# Altium PCB 电机控制.PcbDoc (part 1 of 4)
Units mil, origin at the board's own origin, x right, y up, seen from the top; angles counter-clockwise.
Board outline 4818.9 x 3440.94 mil, 2 copper layers (Top Layer, Bottom Layer); 168 components, 177 nets, 592 pads, 87 vias.
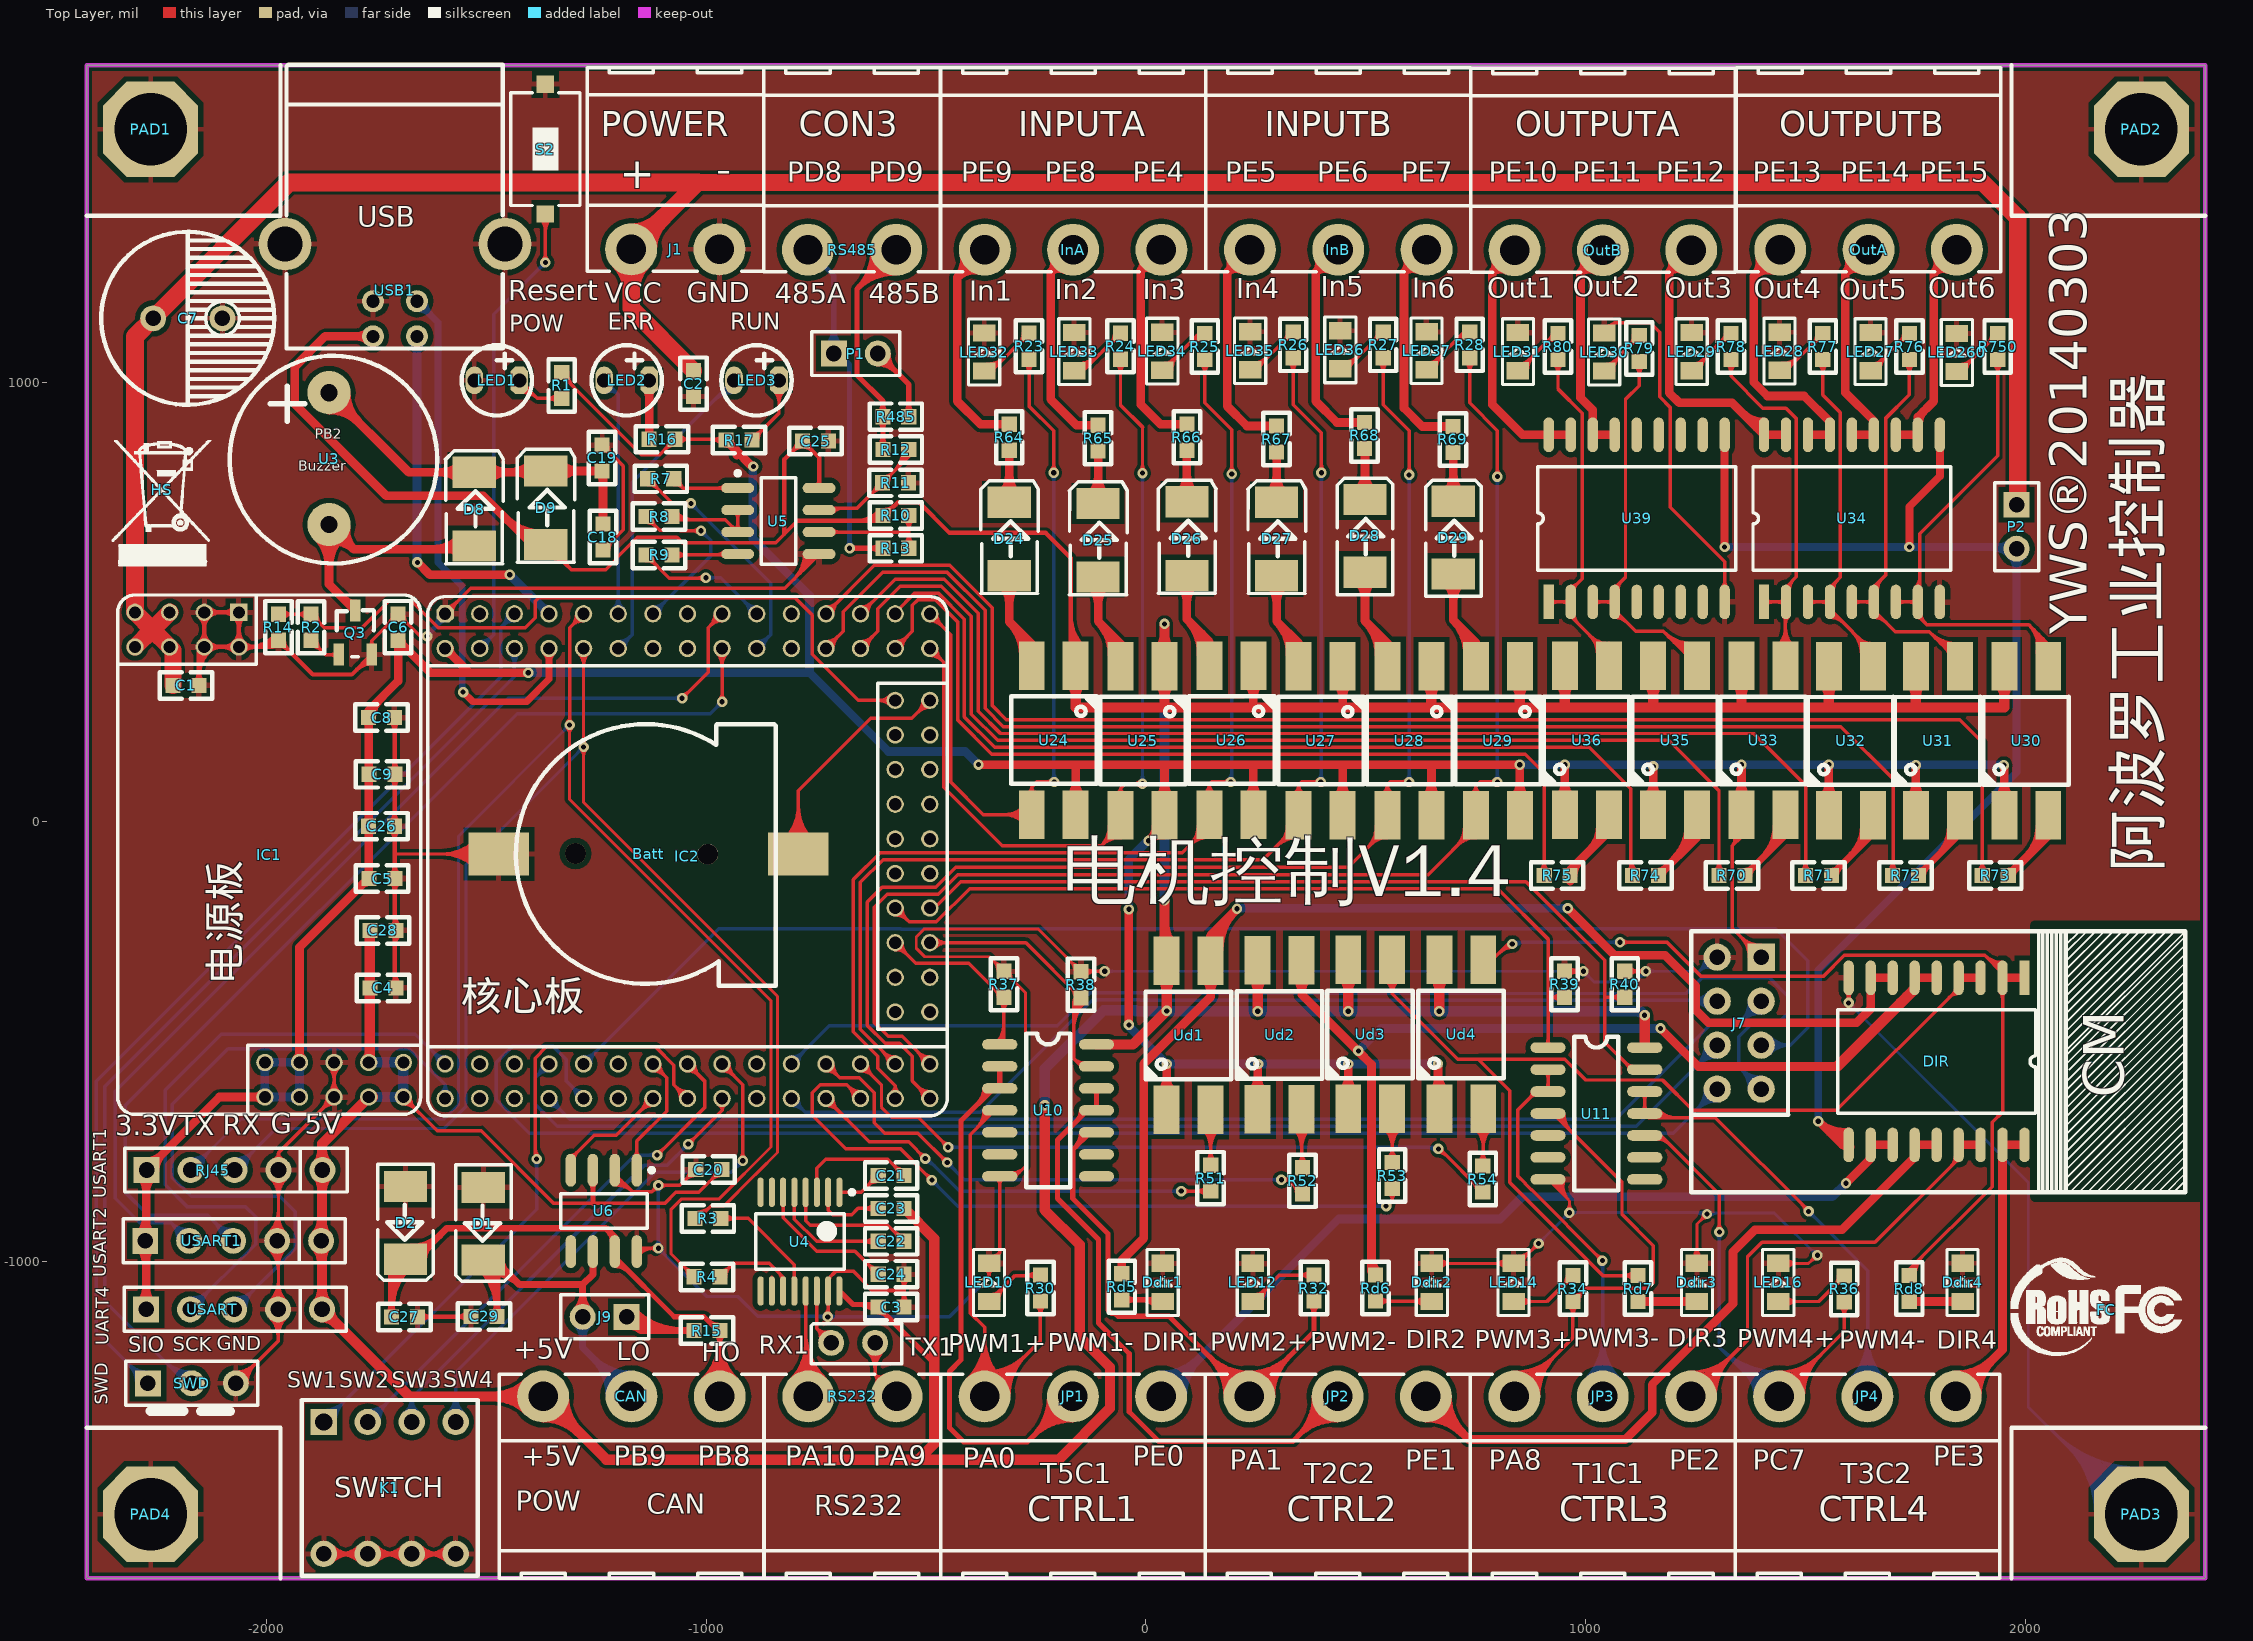
[diagram p0: Top Layer view]
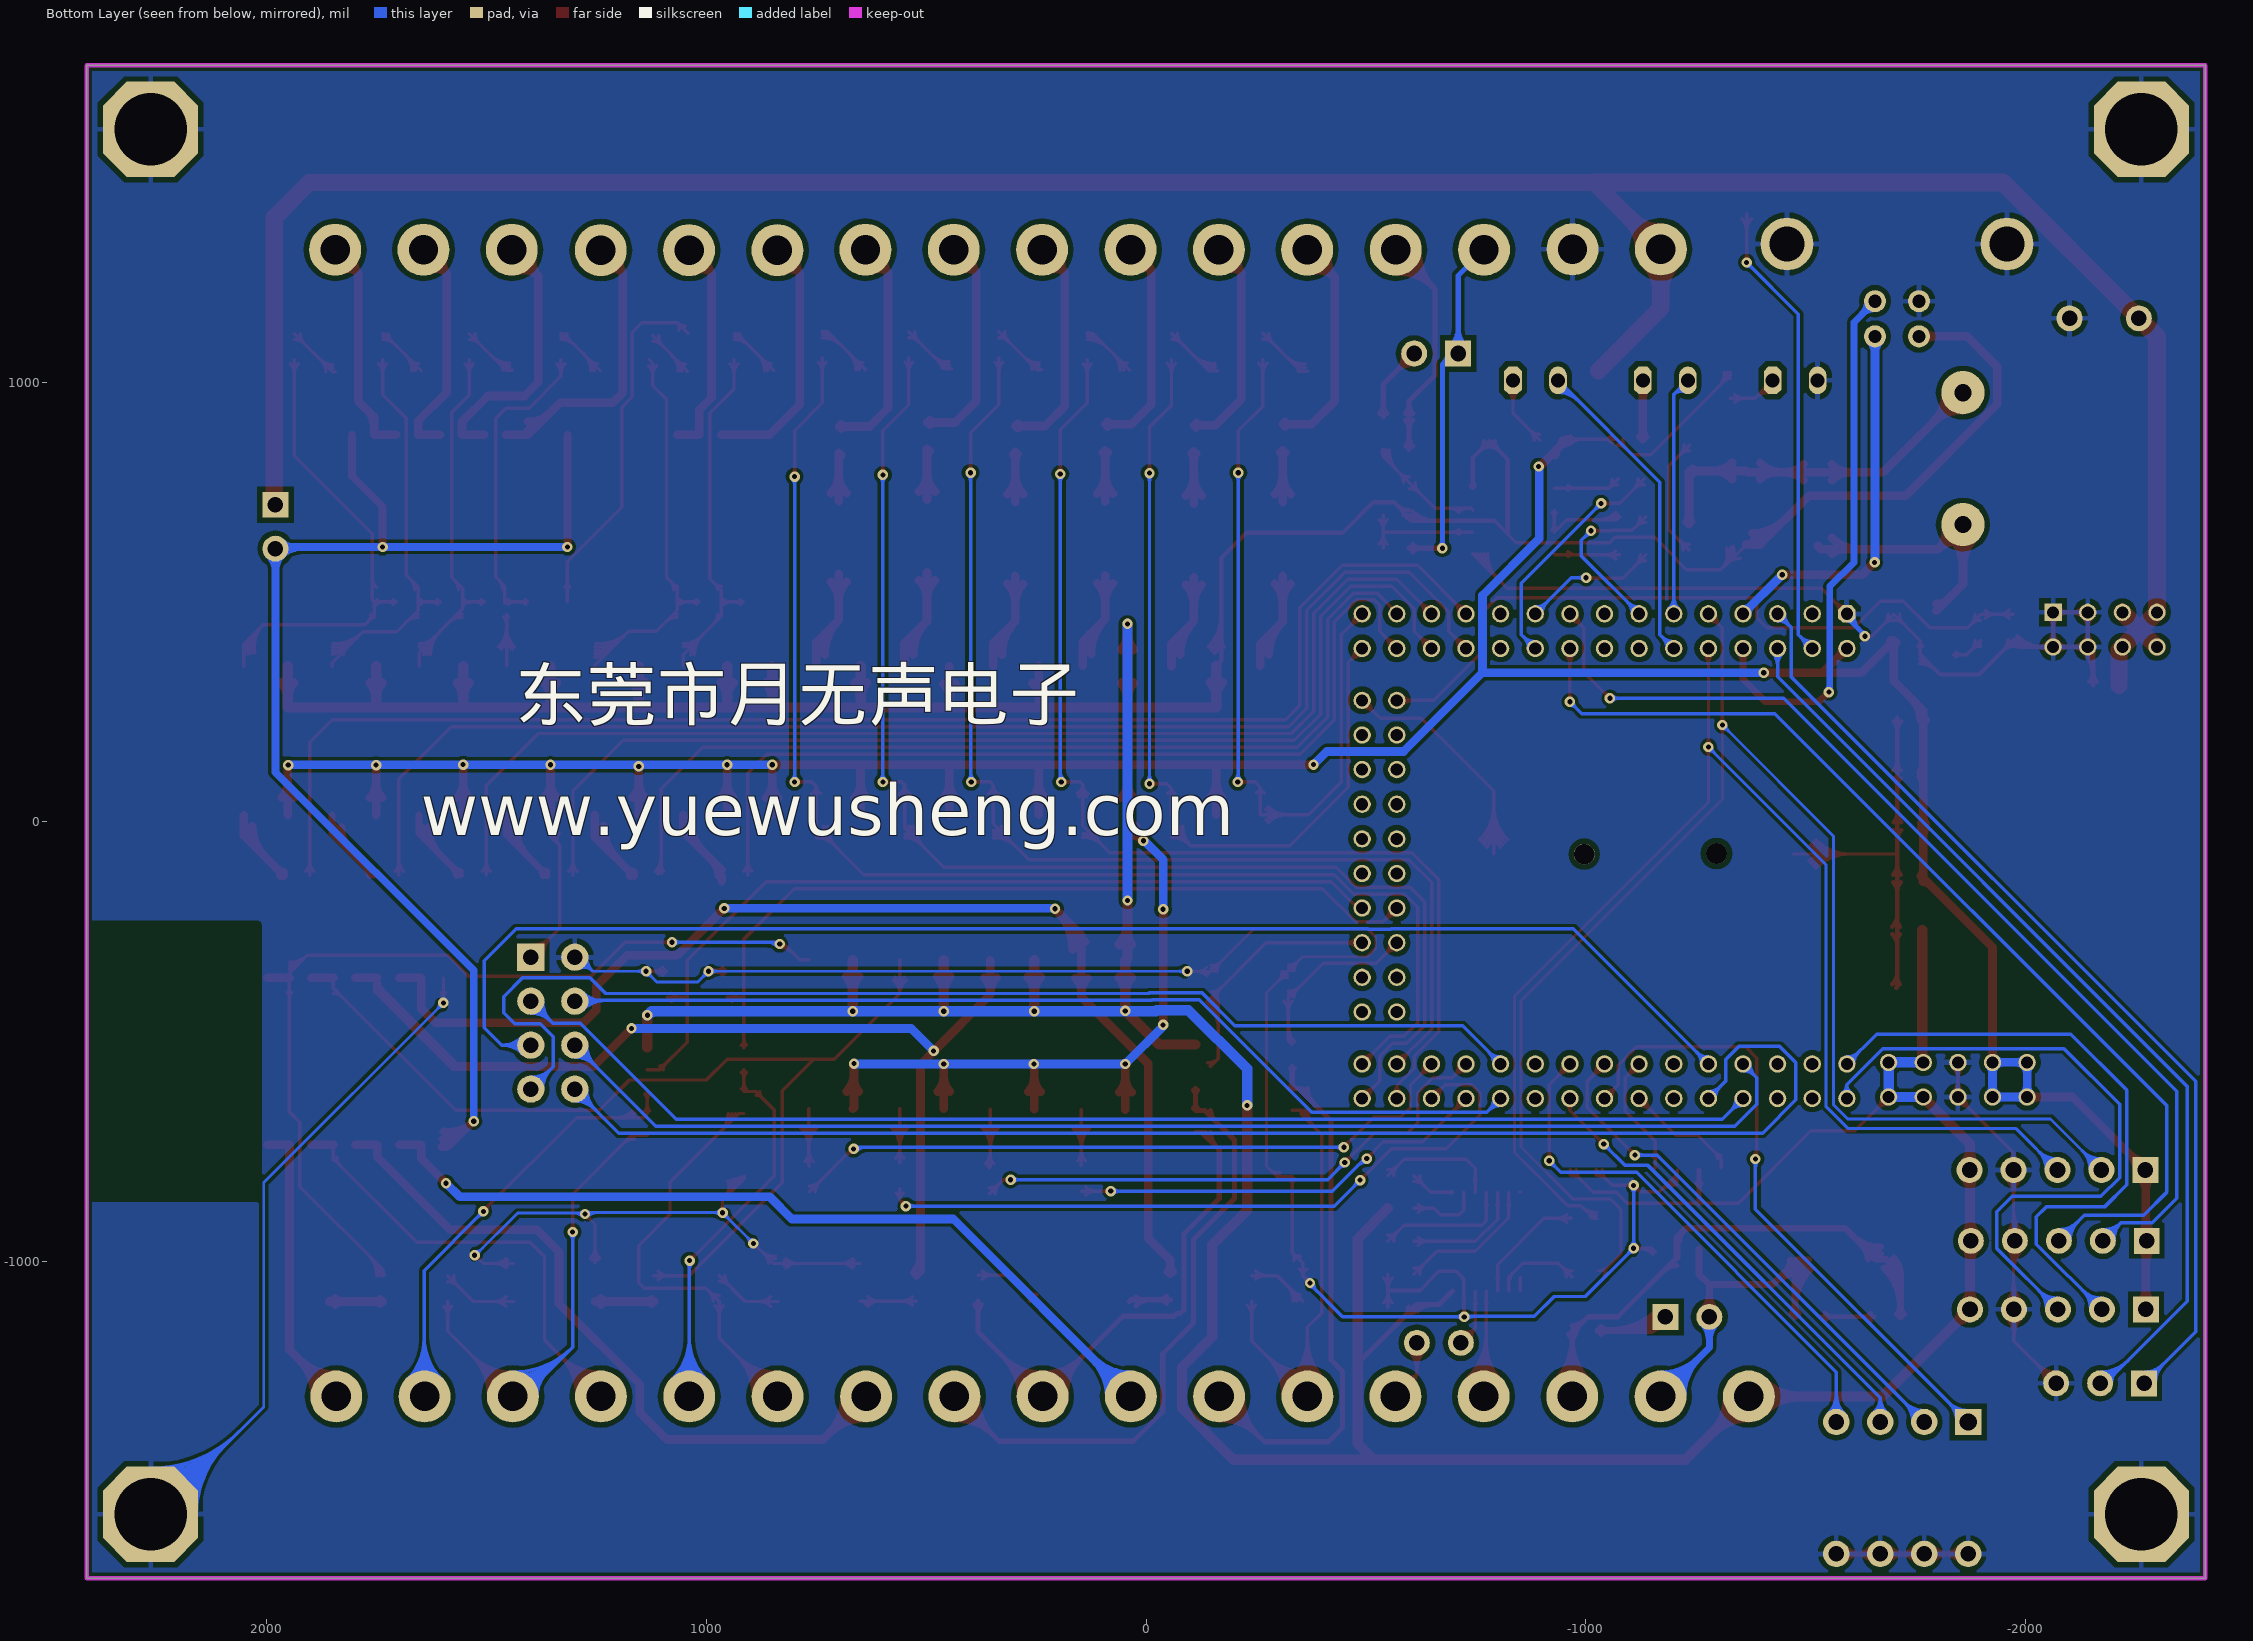
[diagram p1: Bottom Layer view, seen from below]

## Layer stack, top to bottom
Top Layer: signal copper 1.4
Dielectric: dielectric 12.6, FR-4, Dk 4.8
Bottom Layer: signal copper 1.4

## Board outline
-2409.45,-1720.47 2409.45,-1720.47 2409.45,1720.47 -2409.45,1720.47

## Design rules (kind name [scope] priority, off if disabled: settings)
Clearance [(InPadClass('All Pads')) vs InPolygon] p1: gap=11.81
Clearance Clearance_1 [All] p2: gap=7.87
ComponentClearance [All] p1 off: gap=10 collisioncheckmode=3 verticalgap=10 showdistances=FALSE
PlaneConnect [All] p1: planeconnectstyle=Relief reliefexpansion=0 reliefentries=4 reliefconductorwidth=11.81 reliefairgap=20
PolygonConnect PolygonConnect_1 [All vs IsComponentPad] p1: connectstyle=Relief reliefconductorwidth=11.81 reliefentries=4 polygonreliefangle="90 Angle" airgapwidth=11.81
PolygonConnect [All] p2: connectstyle=Direct reliefconductorwidth=11.81 reliefentries=4 polygonreliefangle="90 Angle" airgapwidth=11.81
RoomDefinition 公共电路 [InComponentClass('公共电路')] p1: confinementstyle=ConfineIn formatcopy=TRUE lockcomponents=FALSE outline -2462,-1764.69 2456,-1764.69 2456,1757 -2462,1757
RoomDefinition 电机控制 [InComponentClass('电机控制')] p2: confinementstyle=ConfineIn formatcopy=TRUE lockcomponents=FALSE outline 2480.32,1803.15 -472.44,1803.15 -472.44,-1791.34 2480.32,-1791.34
RoutingVias [All] p1: holewidth=11.81 width=23.62 viastyle="Through Hole" minholewidth=11.81 minwidth=23.62 maxholewidth=11.81 maxwidth=23.62
SolderMaskExpansion [All] p1: expansion=4
Width [All] p1: maxlimit=78.74 minlimit=6.3 preferedwidth=7.87 minimp=50.000000 maximp=50.000000 favimp=50.000000
26 further rules are at their usual default settings.

## Classes and differential pairs
component class 公共电路: Batt C1 C2 C3 C4 C5 C6 C7 C8 C9 C18 C19 C20 C21 C22 C23 C24 C25 C26 C27 C28 C29 CAN D1 D2 D8 D9 FC HS IC1 IC2 J1 J7 J9 K1 LED1 LED2 LED3 P1 PAD1 PAD2 PAD3 PAD4 Q3 R1 R2 R3 R4 R7 R8 R9 R10 R11 R12 R13 R14 R15 R16 R17 R485 RJ45 RS232 RS485 S2 U3 U4 U5 U6 USART usb1
component class 电机控制: D24 D25 D26 D27 D28 D29 Ddir1 Ddir2 Ddir3 Ddir4 DIR InA InB JP1 JP2 JP3 JP4 LED10 LED12 LED14 LED16 LED27 LED28 LED29 LED30 LED31 LED32 LED33 LED34 LED35 LED36 LED37 LED260 OutA OutB P2 R23 R24 R25 R26 R27 R28 R30 R32 R34 R36 R37 R38 R39 R40 R51 R52 R53 R54 R64 R65 R66 R67 R68 R69 R70 R71 R72 R73 R74 R75 R76 R77 R78 R79 R80 R750 Rd5 Rd6 Rd7 Rd8 U10 U11 U24 U25 U26 U27 U28 U29 U30 U31 U32 U33 U34 U35 U36 U39 Ud1 Ud2 Ud3 Ud4

## Components (designator, comment, footprint, x,y, rotation, side; value= is the part's Value field where it differs from the comment)
Batt "" MINI-BAT -791,-73 r180 top (schematic designator BATT1)
C1 "104" 0603A -2213,310 r0 top
C2 "104" 0603A -1029,1026 r270 top
C3 "104" 0603A -609.17,-1103.8 r0 top
C4 "104" 0603A -1765,-378 r0 top
C5 "104" 0603A -1767,-129 r0 top
C6 "104" 0603A -1701,413 r90 top
C7 "680UF/50V" 电解电容10mm -2258,1145 r270 top
C8 "104" 0603A -1768,237 r0 top
C9 "104" 0603A -1767,108 r0 top
C18 "104" 0603A -1235,677 r270 top
C19 "104" 0603A -1237,798 r90 top
C20 "104" 0603A -965,-791 r180 top
C21 "104" 0603A -609.17,-804.58 r0 top
C22 "104" 0603A -609.17,-954.19 r0 top
C23 "104" 0603A -609.17,-879.39 r0 top
C24 "104" 0603A -609.17,-1028.99 r0 top
C25 "104" 0603A -722,866 r180 top
C26 "104" 0603A -1709,-10 r180 top
C27 "104" 0603A -1716,-1126 r0 top
C28 "104" 0603A -1706,-247 r180 top
C29 "102" 0603A -1535,-1125 r0 top
CAN "CON3" CON3-5.1卧 -1371,-1307 r180 top
D1 "P6KE68A" 贴片二极管#1 -1507,-997 r270 top
D2 "P6KE6A" 贴片二极管#1 -1684,-995 r270 top
D8 "RB521S" 贴片二极管#2 -1525,846 r90 top
D9 "RB521S" 贴片二极管#2 -1362,849 r90 top
D24 "4148" 贴片二极管#2 -308,778 r90 top
D25 "4148" 贴片二极管#2 -106,775 r90 top
D26 "4148" 贴片二极管#2 96,779 r90 top
D27 "4148" 贴片二极管#2 300,778 r90 top
D28 "4148" 贴片二极管#1 498,733 r90 top
D29 "4148" 贴片二极管#1 699,729 r90 top
Ddir1 "LED" SMDLED 38,-1091 r90 top
Ddir2 "LED" SMDLED 650,-1091 r90 top
Ddir3 "LED" SMDLED 1253,-1091 r90 top
Ddir4 "LED" SMDLED 1857,-1091 r90 top
DIR "ULN2803" sol18 1998,-355 r270 top
FC "" fc 2184,-1110 r0 top
HS "" HS -2239,755 r0 top
IC1 "电源板" 电源板 -1689,-626 r270 top
IC2 "Core Board" 核心板-物联网1 -1594,473 r180 top
InA "CON3" CON3-5.1卧 35,1301 r0 top
InB "CON3" CON3-5.1卧 638,1301 r0 top
J1 "CON2" CON2-5.1卧 -970,1302 r0 top
J7 "NRF2401模块" NRF24L01 1299,-308 r180 top
J9 "" HDR1X2 -1181.1,-1125.99 r180 top
JP1 "CON3" CON3-5.1卧 -367,-1307 r180 top
JP2 "CON3" CON3-5.1卧 235,-1307 r180 top
JP3 "CON3" CON3-5.1卧 838,-1307 r180 top
JP4 "CON3" CON3-5.1卧 1440,-1307 r180 top
K1 "拨码开关*4" "PCBComponent_1 - duplicate" -1720,-1515 r0 top
LED1 "PLED" LED2.5 -1476.38,1003.94 r0 top
LED2 "RUN" LED2.5 -1181.1,1003.94 r0 top
LED3 "ERR" LED2.5 -885.83,1003.94 r0 top
LED10 "LED" SMDLED -357,-1091 r90 top (schematic designator LED18)
LED12 "LED" SMDLED 243,-1091 r90 top
LED14 "LED" SMDLED 836,-1091 r90 top
LED16 "LED" SMDLED 1438,-1091 r90 top
LED27 "LED" SMDLED 1648,1026 r90 top
LED28 "LED" SMDLED 1441,1027 r90 top
LED29 "LED" SMDLED 1241,1026 r90 top
LED30 "LED" SMDLED 1042,1025 r90 top
LED31 "LED" SMDLED 846,1026 r90 top
LED32 "LED" SMDLED -368,1025 r90 top
LED33 "LED" SMDLED -163,1026 r90 top
LED34 "LED" SMDLED 37,1027 r90 top
LED35 "LED" SMDLED 237,1028 r90 top
LED36 "LED" SMDLED 442,1030 r90 top
LED37 "LED" SMDLED 638,1028 r90 top
LED260 "LED" SMDLED 1844,1024 r90 top
OutA "CON3" CON3-5.1卧 1844,1301 r0 top
OutB "CON3" CON3-5.1卧 1240,1300 r0 top
P1 "" HDR1X2 -710,1065 r0 top
P2 "" HDR1X2 1980,721 r270 top
PAD1 "PAD" PAD -2263.78,1574.8 r0 top
PAD2 "PAD" PAD 2263.78,1574.8 r0 top
PAD3 "PAD" PAD 2263.78,-1574.8 r0 top
PAD4 "PAD" PAD -2263.78,-1574.8 r0 top
Q3 "9013" SOT23 -1836,380 r0 top
R1 "160R" 0603A -1329,1022 r270 top
R2 "1K" 0603A -1899,472 r270 top
R3 "33R" 0603A -1026,-902 r0 top
R4 "33R" 0603A -1028,-1035 r0 top
R7 "33R" 0603A -1133,780 r0 top
R8 "33R" 0603A -1137,694 r0 top
R9 "33R" 0603A -1137,607 r0 top
R10 "100K" 0603A -539.37,696.85 r180 top
R11 "100K" 0603A -599,771 r0 top
R12 "33R" 0603A -539.37,846.46 r180 top
R13 "33R" 0603A -539.37,622.05 r180 top
R14 "10K" 0603A -1973,413 r90 top
R15 "120R" 0603A -969,-1157 r180 top
R16 "160R" 0603A -1071,870 r180 top (schematic designator R38)
R17 "160R" 0603A -955,868 r0 top (schematic designator R39)
R23 "270R" 0603A -266,1052 r90 top
R24 "270R" 0603A -58,1052 r90 top
R25 "270R" 0603A 133.86,1051.18 r90 top
R26 "270R" 0603A 334.65,1055.12 r90 top
R27 "270R" 0603A 539.37,1055.12 r90 top
R28 "270R" 0603A 736.22,1055.12 r90 top
R30 "270R" 0603A -240,-1090 r90 top
R32 "270R" 0603A 382,-1090 r90 top
R34 "270R" 0603A 971,-1091 r90 top
R36 "270R" 0603A 1588,-1092 r90 top
R37 "270R" 0603A -323,-399 r90 top
R38 "270R" 0603A -148,-400 r90 top
R39 "270R" 0603A 952,-399 r90 top
R40 "270R" 0603A 1089,-399 r90 top
R51 "51R" 0603A 147,-840 r90 top (schematic designator Rd1)
R52 "51R" 0603A 356,-846 r90 top (schematic designator Rd2)
R53 "51R" 0603A 560,-834 r90 top (schematic designator Rd3)
R54 "51R" 0603A 766,-842 r90 top (schematic designator Rd4)
R64 "270R" 0603A -311,845 r90 top
R65 "270R" 0603A -109,843 r90 top
R66 "270R" 0603A 93,845 r90 top
R67 "270R" 0603A 297,841 r90 top
R68 "270R" 0603A 497,849 r90 top
R69 "270R" 0603A 698,840 r90 top
R70 "51R" 0603A 1303.15,-122.05 r0 top
R71 "51R" 0603A 1500,-122.05 r0 top
R72 "51R" 0603A 1698,-122.05 r0 top
R73 "51R" 0603A 1902,-122 r0 top
R74 "R" 0603A 1106.3,-122.05 r0 top
R75 "51R" 0603A 905.51,-122.05 r0 top
R76 "270R" 0603A 1736.22,1051.18 r90 top
R77 "270R" 0603A 1539.37,1051.18 r90 top
R78 "270R" 0603A 1330.71,1051.18 r90 top
R79 "270R" 0603A 1122,1047 r90 top
R80 "270R" 0603A 937.01,1051.18 r90 top
R485 "120R" 0603A -539.37,921.26 r180 top
R750 "270R" 0603A 1937.01,1051.18 r90 top
Rd5 "270R" 0603A -55,-1028 r270 top
Rd6 "270R" 0603A 522,-1031 r270 top
Rd7 "270R" 0603A 1119,-1032 r270 top
Rd8 "270R" 0603A 1736,-1032 r270 top
RJ45 "COM2" HDR1X4 -2273,-792 r0 top
RS232 "COM1" CON2-5.1卧 -768,-1307 r180 top
RS485 "COM3" CON2-5.1卧 -568,1301 r0 top (schematic designator J4)
S2 "RESRT" SW-PB2 -1366,1530 r90 top
SWD "Debug" HDR1X3 -2270,-1277 r0 top
U3 "蜂鸣器" 蜂鸣器 -1858,826 r90 top
U4 "SP3232" TSSOP16 -786.93,-954.94 r270 top
U5 "SP485" SO8_L -836,684 r0 top
U6 "TJA1050" SO8_L -1233,-885 r270 top
U10 "74HC04" so-14 -228,-643 r0 top
U11 "74HC04" so-14 1019,-650 r0 top
U24 "TLP521" PC817 -159.82,343 r270 top
U25 "TLP521" PC817 42.18,342 r270 top
U26 "TLP521" PC817 244.18,343 r270 top
U27 "TLP521" PC817 447.18,342 r270 top
U28 "TLP521" PC817 649.18,342 r270 top
U29 "TLP521" PC817 850.18,342 r270 top
U30 "TLP521" PC817 1952,27 r90 top
U31 "TLP521" PC817 1751,27 r90 top
U32 "TLP521" PC817 1553,27 r90 top
U33 "TLP521" PC817 1354.33,27.56 r90 top
U34 "ULN2803" SOL18 1405.51,500 r90 top
U35 "TLP521" PC817 1153.54,27.56 r90 top
U36 "TLP521" PC817 952.76,27.56 r90 top
U39 "ULN2803" sol18 916,500 r90 top
Ud1 "TLP521" PC817 47,-643 r90 top
Ud2 "TLP521" PC817 254,-642 r90 top
Ud3 "TLP521" PC817 460,-641 r90 top
Ud4 "TLP521" PC817 667,-641 r90 top
USART "COM4" HDR1X4 -2274,-1109 r0 top
USART1 "COM4" HDR1X4 -2276,-953 r0 top (schematic designator USART)
USB1 "USB" USB-B3 -1758,1104 r90 top

## Footprints (in the part's own frame and the unit in brackets; to place one, negate y for a bottom-side part, rotate by r counter-clockwise, add the part's x,y. Pads: shape width x height; smd on the part's side, far side on the other; paste and mask are expansions set on the pad)
0603A [mm]
  rect 0.88x0.88 smd: 1(0,0) 2(1.5,0)
  silkscreen extent -0.76,-0.76 2.26,0.76
CON2-5.1卧 [mm]
  round 3 hole 1.7: 1(0,0) 2(-5.1,0)
  silkscreen extent -7.65,-1.28 2.55,10.5
CON3-5.1卧 [mm]
  round 3 hole 1.7: 1(0,0) 2(-5.1,0) 3(-10.2,0)
  silkscreen extent -12.75,-1.28 2.55,10.5
fc [mil]
  silkscreen extent -218,-103 172,118
HDR1X2 [mm] "Connector; Header; 2 Position"
  rect 1.5x1.5 hole 0.9: 1(0,0)
  round 1.5 hole 0.9: 2(2.54,0)
  silkscreen extent -1.27,-1.27 3.81,1.27
HDR1X3 [mm] "Connector; Header; 3 Position"
  rect 1.5x1.5 hole 0.9: 1(0,0)
  round 1.5 hole 0.9: 2(2.54,0) 3(5.08,0)
  silkscreen extent -1.27,-1.27 6.35,1.27
HDR1X4 [mm] "Connector; Header; 4 Position"
  rect 1.5x1.5 hole 0.9: 1(0,0)
  round 1.5 hole 0.9: 2(2.54,0) 3(5.08,0) 4(7.62,0)
  silkscreen extent -1.27,-1.27 8.89,1.27
HS [mil]
  silkscreen extent -113,-173 113,113
LED2.5 [mil]
  oct 40x63 hole 32: A(51.18,0)
  oval 40x63 hole 32: K(-51.18,0)
  silkscreen extent -80,-80 80,80
MINI-BAT [mm]
  round 1.2 hole 1.2: 0(5.226,0.017) 0(12.863,-0.02)
  rect 3.5x2.5 smd: 1(-0.01,0.007) 2(17.29,0.007)
  silkscreen extent 1.29,-7.49 16.31,7.61
NRF24L01 [mil]
  round 62 hole 35: 1(0,0) 3(0,100) 4(-100,100) 5(0,200) 6(-100,200) 7(0,300) 8(-100,300)
  rect 62x62 hole 35: 2(-100,0)
  silkscreen extent -1065,-59 59,535
PAD [mm]
  oct 5.5x5.5 hole 4.2: 1(0,0)
PC817 [mm]
  rect 2.8x1.5 smd: 1(-0.3,0) 2(-0.3,-2.54) 3(8.3,-2.54) 4(8.3,0)
  silkscreen extent 1.46,-3.72 6.53,1.22
"PCBComponent_1 - duplicate" [mil]
  rect 60x60 hole 39.37: 1(-150,150)
  round 60 hole 35.43: 2(-50,150) 3(50,150) 4(150,150) 5(-150,-150) 6(-50,-150) 7(50,-150) 8(150,-150)
  silkscreen extent -200,-200 200,200
SMDLED [mm]
  rect 1x1.3 smd: A(0,0) K(2.2,0)
  silkscreen extent -0.8,-0.9 3,0.9, body extent 0,-0.99 2.2,0.99, height 1.5
SO8_L [mm] "SOIC, 8-Leads, Body 4.9x3.9mm, Pitch 1.27mm, IPC High Density"
  oval 1.9x0.6 smd: 1(-2.35,1.905) 2(-2.35,0.635) 3(-2.35,-0.635) 4(-2.35,-1.905) 5(2.35,-1.905) 6(2.35,-0.635) 7(2.35,0.635) 8(2.35,1.905)
  silkscreen extent -2.47,-2.5 1,2.88, body extent -2,-2.5 2,2.5, height 1.75
so-14 [mil]
  oval 80x24 smd: 1(-104.65,136.53) 2(-104.65,86.53) 3(-104.65,36.53) 4(-104.65,-13.47) 5(-104.65,-63.47) 6(-104.65,-113.47) 7(-104.65,-163.47) 8(115.35,-163.47) 9(115.35,-113.47) 10(115.35,-63.47) 11(115.35,-13.47) 12(115.35,36.53) 13(115.35,86.53) 14(115.35,136.53)
  silkscreen extent -45,-188 55,162
sol18 [mm]
  rect 2x0.6 smd: 1(0,0)
  oval 2x0.6 smd: 2(0,-1.27) 3(0,-2.54) 4(0,-3.81) 5(0,-5.08) 6(0,-6.35) 7(0,-7.62) 8(0,-8.89) 9(0,-10.16) 10(9.65,-10.16) 11(9.65,-8.89) 12(9.65,-7.62) 13(9.65,-6.35) 14(9.65,-5.08) 15(9.65,-3.81) 16(9.65,-2.54) 17(9.65,-1.27) 18(9.65,0)
  silkscreen extent 1.84,-10.79 7.81,0.64
SOL18 [mm]
  rect 2x0.6 smd: 1(0,0)
  oval 2x0.6 smd: 2(0,-1.27) 3(0,-2.54) 4(0,-3.81) 5(0,-5.08) 6(0,-6.35) 7(0,-7.62) 8(0,-8.89) 9(0,-10.16) 10(9.65,-10.16) 11(9.65,-8.89) 12(9.65,-7.62) 13(9.65,-6.35) 14(9.65,-5.08) 15(9.65,-3.81) 16(9.65,-2.54) 17(9.65,-1.27) 18(9.65,0)
  silkscreen extent 1.83,-10.79 7.82,0.64
SOT23 [mil]
  rect 23.62x50 smd: 1(0,0) 2(75,0) 3(38,100)
  silkscreen extent -4,-5 80,101, body extent -20,17 95,85, height 59
SW-PB2 [mm]
  rect 1x1 smd: 1(-3.75,0) 2(3.75,0)
  silkscreen extent -3.25,-2 3.25,2
TSSOP16 [mm] "TSOP, 16-Leads, Body 5x4.4mm, Pitch 0.65mm, IPC Medium Density"
  oval 1.7x0.35 smd: 1(-2.85,2.275) 2(-2.85,1.625) 3(-2.85,0.975) 4(-2.85,0.325) 5(-2.85,-0.325) 6(-2.85,-0.975) 7(-2.85,-1.625) 8(-2.85,-2.275) 9(2.85,-2.275) 10(2.85,-1.625) 11(2.85,-0.975) 12(2.85,-0.325) 13(2.85,0.325) 14(2.85,0.975) 15(2.85,1.625) 16(2.85,2.275)
  silkscreen extent -2.97,-2.55 1.6,3.13, body extent -2.25,-2.55 2.25,2.55, height 1.1
USB-B3 [mil]
  round 50 hole 30: 1(0,0) 2(0,-100) 3(80,-100) 4(80,0)
  round 120 hole 80: 5(210,200) 6(210,-300)
  silkscreen extent -28,-295 618,197
核心板-物联网1 [mm]
  oct 1x1 hole 0.7: 1(0,0)
  round 1 hole 0.7: 2(0,2) 3(-2,0) 4(-2,2) 5(-4,0) 6(-4,2) 7(-6,0) 8(-6,2) 9(-8,0) 10(-8,2) 11(-10,0) 12(-10,2) 13(-12,0) 14(-12,2) 15(-14,0) 16(-14,2) 17(-16,0) 18(-16,2) 19(-18,0) 20(-18,2) 21(-20,0) 22(-20,2) 23(-22,0) 24(-22,2) 25(-24,0) 26(-24,2) 27(-26,0) 28(-26,2) 29(-28,0) 30(-28,2) 31(-26,5) 32(-28,5) 33(-26,7) 34(-28,7) 35(-26,9) 36(-28,9) 37(-26,11) 38(-28,11) 39(-26,13) 40(-28,13) 41(-26,15) 42(-28,15) 43(-26,17) 44(-28,17) 45(-26,19) 46(-28,19) 47(-26,21) 48(-28,21) 49(-26,23) 50(-28,23) 51(-28,26) 52(-28,28) 53(-26,26) 54(-26,28) 55(-24,26) 56(-24,28) 57(-22,26) 58(-22,28) 59(-20,26) 60(-20,28) 61(-18,26) 62(-18,28) 63(-16,26) 64(-16,28) 65(-14,26) 66(-14,28) 67(-12,26) 68(-12,28) 69(-10,26) 70(-10,28) 71(-8,26) 72(-8,28) 73(-6,26) 74(-6,28) 75(-4,26) 76(-4,28) 77(-2,26) 78(-2,28) 79(0,26) 80(0,28)
  silkscreen extent -29,-1 1,29
电源板 [mm]
  round 1 hole 0.7: 1(-2,0) 1(-2,-2) 1(0,0) 1(0,-2) 2(-2,-4) 2(0,-4) 3(-2,-6) 3(-2,-8) 3(0,-6) 3(0,-8) 4(-28,-11.5) 4(-26,-11.5) 4(-26,-9.5) 6(-28,-15.5) 6(-28,-13.5) 6(-26,-15.5) 6(-26,-13.5)
  rect 1x1 hole 0.7: 5(-28,-9.5)
  silkscreen extent -29,-16.5 1,1
电解电容10mm [mm]
  round 1.5 hole 0.9: 1(0,0) 2(0,4)
  silkscreen extent -5,-3 5,7
蜂鸣器 [mm]
  round 2.5 hole 1: 1(3.81,0) 2(-3.81,0)
  silkscreen extent -6.06,-6.25 5.94,5.75
贴片二极管#1 [mm]
  rect 1.8x2.5 smd: A(-4.2,0) K(0,0)
  silkscreen extent -5.5,-1.6 1.22,1.6
贴片二极管#2 [mm]
  rect 1.8x2.5 smd: A(-5.55,0.075) K(-1.3,0.075)
  silkscreen extent -6.58,-1.61 -0.05,1.73

## Part data
Batt: library part Battery, "XH414H"
C1 C2 C3 C4 C5 C6 C8 C9 C18 C19 C20 C21 C22 C23 C24 C25 C26 C27 C28 C29: library part CAP, "Capacitor"
C7: library part "CAPACITOR POL", "Capacitor"
D1 D2 D8 D9 D24 D25 D26 D27 D28 D29: library part 二极管
FC HS: library part PAD
IC2: library part 物联网核心板
J9 P1 P2: library part "Header 2", "Header, 2-Pin"
LED1 LED2 LED3: library part LED
Q3: library part NPN
R1 R2 R3 R4 R7 R8 R9 R10 R11 R12 R13 R14 R15 R16 R17 R485: library part RES2
R23 R24 R25 R26 R27 R28 R30 R32 R34 R36 R37 R38 R39 R40 R51 R52 R53 R54 R64 R65 R66 R67 R68 R69 R70 R71 R72 R73 R74 R75 R76 R77 R78 R79 R80 R750 Rd5 Rd6 Rd7 Rd8: library part Res2, "Resistor"
RJ45: library part CON4
RS232 RS485: library part CON2
S2: library part SW-PB
U4: library part SP3232EEA
U24 U25 U26 U27 U28 U29 U30 U31 U32 U33 U35 U36 Ud1 Ud2 Ud3 Ud4: library part TLP521-1, "Single NPN PhotoTransistor OptoCoupler."
USART USART1: library part "Header 4", "Header, 4-Pin"
USB1: library part "HEADER 3X2"

## Free pads (board coordinates)
  round 59.05 hole 35.43: 0(-1873,-792) 1(-1876,-953) 1(-1874,-1109) 1(-716,-1185) 1(-616,-1185)

## Via types
v1: diameter 23.62, hole 11.81, Top Layer to Bottom Layer, 87 vias

## Nets (pads, with @x,y where several pads share a name; then routed paths per layer and width w, separated by ;. In a path a pad name is that pad's centre, name@x,y a point inside that pad or via, vN(x,y) a via of type N, cw(c..) or ccw(c..) an arc to the next point about the centre after c; other vN are vias at no path point)
232T: pad.1@-616,-1185 RS232.2 | length 347.8
  Top Layer w8: pad.1@-634.05,-1203.05 cw(c-677.63,-1246.63) -616,-1246.63 cw(c-554.37,-1246.63) pad.1@-597.95,-1203.05 ; pad.1@-628.39,-1197.39 cw(c-658.32,-1227.32) -616,-1227.32 cw(c-573.68,-1227.32) pad.1@-603.61,-1197.39 ; pad.1@-616,-1185 -616,-1258.21 ; RS232.2@-613.81,-1277.68 ccw(c-627.1,-1269.32) -616,-1258.21 ; RS232.2@-596.53,-1260.4 cw(c-604.9,-1247.11) -616,-1258.21 ; RS232.2@-567.21,-1307 -616,-1258.21
485A: P1.1 R13.2 RS485.2 | length 1031.1
  Top Layer w11.81: v1(-674,622) -674.9,622 -674.95,622.05 R13.2@-598.43,622.05 ; v1@-669.82,617.82 cw(c-659.63,607.63) -659.63,622.05 ; v1@-669.82,626.18 ccw(c-659.86,636.14) -659.86,622.05 ; R13.2@-606.5,613.97 ccw(c-625.99,594.48) -625.99,622.05 ccw(c-625.99,649.61) R13.2@-606.5,630.12
  Bottom Layer w11.81: RS485.2@-768.79,1301 -710,1242.21 P1.1@-710,1065 -699,1065 -674,1040 ; P1.1@-726.7,1081.7 ccw(c-767.03,1122.03) -710,1122.03 ccw(c-652.97,1122.03) P1.1@-693.3,1081.7 ; P1.1@-699.24,1043.97 cw(c-689.35,1024.65) -674,1040 ; P1.1@-686.38,1065 ccw(c-655.91,1065) -677.45,1043.45 ; v1@-678.18,626.18 ccw(c-688.26,636.26) -674,636.26 ccw(c-659.74,636.26) v1@-669.82,626.18 ; v1(-674,622) -674,1040
485B: R12.2 R485.2 RS485.1 | length 1106.4
  Top Layer w11.81: RS485.1@-621.15,1300.47 cw(c-745.19,1299.24) -657.48,1211.53 ; RS485.1@-609.34,1300.59 cw(c-705.82,1299.63) -637.59,1231.41 cw(c-569.37,1163.18) RS485.1@-568.41,1259.66 ; R12.2@-606.5,854.53 ccw(c-625.99,874.02) -598.43,874.02 ccw(c-570.86,874.02) R12.2@-590.35,854.53 ; R485.2@-606.5,913.19 cw(c-625.99,893.7) -598.43,893.7 cw(c-570.86,893.7) R485.2@-590.35,913.19 ; R485.2@-606.5,929.33 ccw(c-625.99,948.82) -598.43,948.82 ccw(c-570.86,948.82) R485.2@-590.35,929.33 ; R12.2@-598.43,846.46 R485.2@-598.43,921.26 -598.43,956.69 -657.48,1015.75 -657.48,1211.52 ; RS485.1@-597.53,1300.71 cw(c-666.44,1300.03) -617.71,1251.29 cw(c-568.98,1202.56) RS485.1@-568.29,1271.47 ; RS485.1@-568.53,1247.85 ccw(c-569.76,1123.81) -657.48,1211.53 ; RS485.1@-568,1301 -657.48,1211.52
+3.3V: C5.1 C6.1 C8.1 C9.1 C26.2 IC1.3 IC2.2 J7.2 R1.1 R16.1 R17.1 RJ45.1 U24.4 U25.4 U26.4 U27.4 U28.4 U29.4 U30.1 U31.1 U32.1 U33.1 U35.1 U36.1 Ud1.1 Ud2.1 Ud3.1 Ud4.1 USART1.1 USART.1 | length 13295.2
  Top Layer w7.87: -1925.22,-287.22 -1924.22,-286.22 ; R1.1@-1329,1008.62 cw(c-1329,990.79) -1316.39,1003.39 ; R1.1@-1329,1022 -1329,1016 -1148,835 -1106,835 R16.1@-1071,870 R17.1@-957,870 ; R1.1@-1323.49,1022 ccw(c-1295.69,1022) -1315.35,1002.35 ; R1.1@-1315.61,1022 ccw(c-1268.81,1022) -1301.9,988.9 ; R16.1@-1084.38,870 cw(c-1116.7,870) -1093.85,847.15 cw(c-1071,824.3) R16.1@-1071,856.61 ; R16.1@-1061.53,860.53 cw(c-1038.68,837.68) -1038.68,870 cw(c-1038.68,902.32) R16.1@-1061.53,879.46 ; -992.14,870 cw(c-992.14,830.86) R17.1@-964.46,858.54 ; -982.49,870 ccw(c-982.49,895.49) R17.1@-964.46,877.47 ; -973.13,870 cw(c-973.13,849.87) R17.1@-958.9,864.1 ; U33.1@1334.52,-26.04 cw(c1317.83,-39.68) 1333.07,-54.93 ; 1339.23,-48.77 ccw(c1324.6,-34.15) U33.1@1340.61,-21.06 ; 1345.38,-42.62 ccw(c1331.37,-28.61) U33.1@1346.71,-16.07 ; U33.1@1354.33,15.75 1354.33,-33.67 1333.07,-54.93 ; J7.2@1371.94,-308 ccw(c1306.6,-308) 1352.8,-261.8 ccw(c1399,-215.6) J7.2@1399,-280.94 ; J7.2@1379.81,-308 ccw(c1333.49,-308) 1366.24,-275.24 ccw(c1399,-242.48) J7.2@1399,-288.81 ; J7.2@1399,-308 1333.07,-242.07 1333.07,-54.93
  Top Layer w19.68: USART1.1@-2289.92,-966.92 cw(c-2328.35,-1005.35) -2274,-1005.35 ; USART1.1@-2289.92,-939.08 ccw(c-2328.35,-900.65) -2274,-900.65 ; USART.1@-2287.92,-1095.08 ccw(c-2321.52,-1061.48) -2274,-1061.48 ccw(c-2226.48,-1061.48) USART.1@-2260.08,-1095.08 ; RJ45.1@-2286.92,-805.92 cw(c-2318.11,-837.11) -2274,-837.11 ; USART.1@-2274,-1109 -2274,-793 RJ45.1@-2273,-792 -2107,-626 IC1.3@-2003.96,-626 ; -2274,-995.7 cw(c-2233.3,-995.7) USART1.1@-2262.08,-966.92 ; -2274,-910.3 ccw(c-2233.3,-910.3) USART1.1@-2262.08,-939.08 ; -2274,-841.94 cw(c-2223.06,-841.94) RJ45.1@-2259.08,-805.92 ; RJ45.1@-2273,-772.32 ccw(c-2273,-724.79) -2239.4,-758.4 ccw(c-2205.79,-792) RJ45.1@-2253.31,-792 ; IC1.3@-2010.92,-632.96 ccw(c-2027.72,-649.76) -2027.72,-626 ccw(c-2027.72,-602.24) IC1.3@-2010.92,-619.04 ; IC1.3@-1932.18,-540.3 ccw(c-1948.99,-523.49) -1925.22,-523.49 ccw(c-1901.46,-523.5) IC1.3@-1918.26,-540.3 ; IC1.3@-1925.22,-547.26 -1925.22,-287.22 ; -1925.22,-285.22 -1768,-128 C8.1@-1768,237 -1768,253 -1701,320 C6.1@-1701,413 -1627,339 -1538.74,339 ; C5.1@-1783.18,-143.18 cw(c-1767,-159.37) C5.1@-1767,-136.48 ; C26.2@-1773.34,-15.29 cw(c-1786.24,-28.19) -1768,-28.19 ; C26.2@-1773.34,-4.71 ccw(c-1786.24,8.19) -1768,8.19 ; C8.1@-1773.29,231.71 cw(c-1786.06,218.94) -1768,218.94 cw(c-1749.94,218.94) C8.1@-1762.71,231.71 ; -1768,-108.53 ccw(c-1746.53,-108.53) C5.1@-1761.71,-123.71 ; -1768,-27.93 cw(c-1750.13,-27.93) C26.2@-1762.77,-15.29 ; -1768,7.93 ccw(c-1750.13,7.93) C26.2@-1762.77,-4.71 ; -1768,87.52 cw(c-1746.52,87.52) C9.1@-1761.71,102.71 ; -1768,128.48 ccw(c-1746.52,128.48) C9.1@-1761.71,113.29 ; C8.1@-1760.52,237 cw(c-1703.84,237) -1743.92,277.08 ; C6.1@-1706.29,407.71 cw(c-1719.06,394.94) -1701,394.94 cw(c-1682.94,394.94) C6.1@-1695.71,407.71 ; C6.1@-1701,405.52 cw(c-1701,387.46) -1688.23,400.23 cw(c-1675.46,413) C6.1@-1693.52,413 ; IC2.2@-1594,384.42 cw(c-1594,360.66) -1577.2,377.46 cw(c-1560.39,394.26) IC2.2@-1584.16,394.26 ; IC2.2@-1594,394.26 -1538.74,339 ; v1(-1405,339) -1538.74,339 ; R17.1@-957,870 R17.1@-955,868 -930.98,843.98 -930.98,843.34 -898.64,811 v1@-895.64,811 ; R17.1@-955.66,860.55 cw(c-958.06,833.58) -930.98,833.58 ; R17.1@-955.56,860.54 cw(c-957.56,834.04) -930.98,834.04 ; R17.1@-955,860.52 cw(c-955,842.46) -942.23,855.23 cw(c-929.46,868) R17.1@-947.52,868 ; v1@-895.64,808 v1(-893,808) ; v1(-381,130) -380.71,129.71 -159.82,129.71 ; U24.4@-173.74,55.74 ccw(c-207.34,89.34) -159.82,89.34 ccw(c-112.3,89.34) U24.4@-145.9,55.74 ; U24.4@-159.82,16.23 -159.82,129.71 ; v1(-39,-462) v1(-39,-199) ; v1@11.08,-37.92 ccw(c-16.48,-10.36) U25.4@22.5,-10.36 ; U25.4@28.26,54.74 ccw(c-5.34,88.34) 42.18,88.34 ccw(c89.7,88.34) U25.4@56.1,54.74 ; Ud1.1@33.08,-615.3 ccw(c-0.52,-581.7) 47,-581.7 ccw(c94.52,-581.7) Ud1.1@60.92,-615.3 ; U25.4@40.8,-30 ccw(c37.65,-74.65) v1(6,-43) 42.18,-6.82 U25.4@42.18,15.23 42.18,129.71 ; Ud1.1@47,-654.81 v1(47,-551) ; U26.4@230.26,55.74 ccw(c196.66,89.34) 244.18,89.34 ccw(c291.7,89.34) U26.4@258.1,55.74 ; Ud2.1@240.08,-614.3 ccw(c206.48,-580.7) 254,-580.7 ccw(c301.52,-580.7) Ud2.1@267.92,-614.3 ; U26.4@244.18,16.23 244.18,129.71 ; Ud2.1@254,-653.81 254,-552 v1(255,-551) ; U27.4@433.26,54.74 ccw(c399.66,88.34) 447.18,88.34 ccw(c494.7,88.34) U27.4@461.1,54.74 ; Ud3.1@446.08,-613.3 ccw(c412.48,-579.7) 460,-579.7 ccw(c507.52,-579.7) Ud3.1@473.92,-613.3 ; U27.4@447.18,15.23 447.18,129.71 ; Ud3.1@460,-652.81 v1(460,-551) ; U28.4@635.26,54.74 ccw(c601.66,88.34) 649.18,88.34 ccw(c696.7,88.34) U28.4@663.1,54.74 ; U28.4@649.18,15.23 649.18,129.71 ; Ud4.1@653.08,-613.3 ccw(c626.72,-586.94) 664,-586.94 ; 664,-572.45 ccw(c721.77,-572.45) Ud4.1@680.92,-613.3 ; v1(664,-550) 664,-649.81 Ud4.1@667,-652.81 ; U29.4@836.26,54.74 ccw(c802.66,88.34) 850.18,88.34 ccw(c897.7,88.34) U29.4@864.1,54.74 ; U29.4@850.18,15.23 v1(850.18,129.71) 649.18,129.71 ; U36.1@938.84,55.26 ccw(c905.23,88.86) 952.76,88.86 ccw(c1000.28,88.86) U36.1@966.68,55.26 ; U36.1@952.76,15.75 v1(952.76,129.92) ; U35.1@1139.62,55.26 ccw(c1106.02,88.86) 1153.54,88.86 ccw(c1201.07,88.86) U35.1@1167.46,55.26 ; U35.1@1153.54,15.75 v1(1153.54,125.98) ; U33.1@1340.41,55.26 ccw(c1306.81,88.86) 1354.33,88.86 ccw(c1401.85,88.86) U33.1@1368.25,55.26 ; U33.1@1354.33,15.75 v1(1354.33,129.92) ; U32.1@1539.08,54.7 ccw(c1505.48,88.3) 1553,88.3 ccw(c1600.52,88.3) U32.1@1566.92,54.7 ; U32.1@1553,15.19 v1(1553,130) ; U31.1@1737.08,54.7 ccw(c1703.48,88.3) 1751,88.3 ccw(c1798.52,88.3) U31.1@1764.92,54.7 ; U31.1@1751,15.19 v1(1751,129) ; U30.1@1938.08,54.7 ccw(c1904.48,88.3) 1952,88.3 ccw(c1999.52,88.3) U30.1@1965.92,54.7 ; v1(1951,129) 1952,130 U30.1@1952,15.19 ; -159.82,129.71 42.18,129.71 ; 42.18,129.71 244.18,129.71 ; 244.18,129.71 447.18,129.71 ; 447.18,129.71 649.18,129.71
  Bottom Layer w19.68: IC1.3@-2010.92,-619.04 ccw(c-2027.73,-602.23) -2003.96,-602.23 ccw(c-1980.2,-602.24) -1997,-619.04 ccw(c-1980.2,-602.23) -1980.2,-626 ccw(c-1980.2,-649.76) IC1.3@-1997,-632.96 ; IC1.3@-2010.92,-554.22 cw(c-2027.73,-571.02) -2003.96,-571.02 ; -2003.96,-571.02 cw(c-1980.2,-571.02) -1997,-554.22 cw(c-1980.2,-571.02) -1980.2,-547.26 cw(c-1980.2,-523.49) IC1.3@-1997,-540.3 ; IC1.3@-1932.18,-632.96 ccw(c-1948.98,-649.76) -1948.98,-626 ccw(c-1948.99,-602.23) -1932.18,-619.04 ccw(c-1948.99,-602.23) -1925.22,-602.23 ccw(c-1901.46,-602.24) IC1.3@-1918.26,-619.04 ; IC1.3@-1932.18,-540.3 cw(c-1948.99,-523.49) -1948.99,-547.26 cw(c-1948.98,-571.02) -1932.18,-554.22 cw(c-1948.99,-571.02) -1925.22,-571.02 ; -1925.22,-571.02 cw(c-1901.46,-571.02) IC1.3@-1918.26,-554.22 ; IC1.3@-1925,-547 IC1.3@-1925.22,-547.26 ; v1(-1405,339) -765.66,339 -765.26,339.4 ; v1(-893,808) -894,809 -894,643.48 -765.26,514.74 -765.26,339.4 ; v1(-381,130) -411.01,160.01 -585.87,160.01 -765.26,339.4 ; v1@-39,-465 v1(47,-551) v1(460,-551) 663,-551 v1(664,-550) ; v1(-39,-199) -39,-86 5,-42 v1(6,-43) ; v1(850.18,129.71) v1@1153.54,129.71 ; 1139.8,129.71 cw(c1139.8,112.24) v1@1152.15,124.59 ; v1(1153.54,125.98) v1@1153.54,129.71 ; v1@1154.94,124.59 cw(c1167.29,112.24) 1167.29,129.71 ; v1(1354.33,129.92) v1@1354.33,129.71 ; v1(1553,130) v1@1553,129.71 ; v1(1751,129) v1@1751,129.71 ; v1(1951,129) 1951,129.71 v1@1751,129.71 ; IC1.3@-1925.22,-547.26 IC1.3@-1925.22,-626 IC1.3@-2003.96,-626 IC1.3@-2003.96,-547.26 IC1.3@-1925.22,-547.26 ; v1@1153.54,129.71 v1@1354.33,129.71 ; v1@1354.33,129.71 v1@1553,129.71 ; v1@1553,129.71 v1@1751,129.71
+5V: C3.1 C4.1 C20.1 C23.2 C25.2 C28.2 CAN.1 D9.A IC1.1 pad.0 pad.1@-1874,-1109 pad.1@-1876,-953 R10.2 U4.16 U5.8 U6.3 U10.14 U11.14 U24.1 U25.1 U26.1 U27.1 U28.1 U29.1 U30.4 U31.4 U32.4 U33.4 U35.4 U36.4 Ud1.4 Ud2.4 Ud3.4 Ud4.4 USB1.1 | length 17981
  Top Layer w7.87: D9.A@-1364.95,630.49 -1307.27,572.81 ; D9.A@-1351.17,599 cw(c-1351.17,556.23) -1320.93,586.47 ; D9.A@-1335.94,626.49 ccw(c-1301.45,617.43) -1326.67,592.21 ; D9.A@-1328.33,624.49 ccw(c-1286.09,613.39) -1316.97,582.51 ; D9.A@-1320.71,622.49 ccw(c-1270.73,609.36) -1307.27,572.81 ; -792.61,684.39 -842,635 -1054.59,635 -1066.67,647.08 -1157,647.08 -1205.87,598.21 -1205.87,595.73 -1228.78,572.81 -1307.27,572.81
  Top Layer w8: IC1.1@-1689,-641.68 cw(c-1689,-679.55) -1662.23,-652.77 cw(c-1635.45,-626) IC1.1@-1673.32,-626 ; IC1.1@-1689,-626 -1612,-703 -1512,-703 -1347,-868 -1257,-868 -1094.49,-868 -1069.3,-842.81 -1016.81,-842.81 C20.1@-965,-791 ; C20.1@-978.32,-791 cw(c-1010.49,-791) -987.74,-813.74 cw(c-965,-836.49) C20.1@-965,-804.32
  Top Layer w9.84: -822.83,655.17 -822.83,824.22 C25.2@-781.05,866 -743.48,828.42 U5.8@-743.48,759 ; C25.2@-793.46,866 cw(c-823.4,866) -802.23,844.83 cw(c-781.05,823.66) -781.05,853.6 cw(c-781.05,823.66) -759.88,844.83 cw(c-738.71,866) C25.2@-768.65,866 ; -792.61,684.39 R10.2@-610.88,684.39 ; U5.8@-748.35,763.87 ccw(c-760.11,775.63) -743.48,775.63 ccw(c-726.85,775.63) U5.8@-738.61,763.87 ; -658.44,684.39 ccw(c-658.44,756.86) R10.2@-607.19,705.62 ; -634.68,684.39 ccw(c-634.68,733.1) R10.2@-600.23,698.66 ; R10.2@-598.43,709.25 ccw(c-598.43,750.61) -569.18,721.37 ; R10.2@-593.27,691.7 cw(c-610.91,709.34) R10.2@-610.91,684.39 ; R10.2@-586.02,696.85 cw(c-567.5,696.85) -580.6,709.94 ; U24.1@-177.22,397.8 ccw(c-192.23,412.81) -171,412.81 ; -171,419.28 ccw(c-120.94,419.28) U24.1@-156.34,383.88 ; -171,443.04 ccw(c-97.18,443.04) U24.1@-149.38,390.84 ; -171,466.8 ccw(c-73.42,466.8) U24.1@-142.42,397.8 ; U24.1@-159.82,354.81 -171,365.99 -171,600 -228,657 -446.78,657 -516.75,726.97 -563.58,726.97 -593.69,696.85 R10.2@-598.43,696.85 R10.2@-610.88,684.39
  Top Layer w11.81: U6.3@-1262.18,-822.24 cw(c-1272.26,-832.33) -1258,-832.33 cw(c-1243.74,-832.33) U6.3@-1253.82,-822.24 ; U6.3@-1258,-792.48 -1258,-867 -1257,-868 ; U4.16@-697.36,-1067.14 -666.5,-1098 -614.97,-1098 C3.1@-609.17,-1103.8 -482.97,-1230 ; -650.73,-1098 cw(c-650.73,-1145.35) C3.1@-617.25,-1111.87 ; C3.1@-609.17,-1115.21 cw(c-609.17,-1142.78) -589.68,-1123.29 cw(c-570.19,-1103.8) C3.1@-597.76,-1103.8
  Top Layer w19.68: USB1.1@-1768.72,1093.28 ccw(c-1794.59,1067.41) -1794.59,1104 ccw(c-1794.59,1140.59) USB1.1@-1768.72,1114.72 ; USB1.1@-1758,1104 -1867,1104 -1936,1035 -1936,950 -1727.67,741.67 -1507.67,741.67 -1396.49,630.49 D9.A@-1364.95,630.49 ; -1452.74,686.74 ccw(c-1378.73,760.75) D9.A@-1378.73,656.09 ; -1419.14,653.14 ccw(c-1378.73,693.54) D9.A@-1378.73,636.4 ; U26.1@230.26,315.3 cw(c196.66,281.7) 244.18,281.7 cw(c291.7,281.7) U26.1@258.1,315.3 ; 244.18,259.84 U26.1@244.18,354.81 ; U27.1@433.26,314.3 cw(c399.66,280.7) 447.18,280.7 cw(c494.7,280.7) U27.1@461.1,314.3 ; 447.18,259.84 U27.1@447.18,353.81
  Top Layer w23.62: pad.1@-1888.53,-965.53 cw(c-1923.6,-1000.6) -1874,-1000.6 ; pad.1@-1888.53,-940.47 ccw(c-1923.6,-905.4) -1874,-905.4 ; pad.1@-1886.53,-1096.47 ccw(c-1916.77,-1066.23) -1874,-1066.23 ccw(c-1831.23,-1066.23) pad.1@-1861.47,-1096.47 ; pad.0@-1885.53,-804.53 cw(c-1913.36,-832.36) -1874,-832.36 ; pad.0@-1885.53,-779.47 ccw(c-1913.36,-751.64) -1874,-751.64 ; pad.1@-1874,-1126.72 cw(c-1874,-1169.49) -1843.76,-1139.24 cw(c-1813.51,-1109) pad.1@-1856.28,-1109 ; -1874,-990.94 cw(c-1838.06,-990.94) pad.1@-1863.47,-965.53 ; -1874,-915.06 ccw(c-1838.06,-915.06) pad.1@-1863.47,-940.47 ; -1874,-837.19 cw(c-1827.81,-837.19) pad.0@-1860.47,-804.53 ; -1874,-746.81 ccw(c-1827.81,-746.81) pad.0@-1860.47,-779.47 ; IC1.1@-1773.31,-541.69 ccw(c-1793.24,-521.76) -1765.05,-521.76 ; IC1.1@-1767.74,-626 -1874,-732.26 pad.1@-1874,-1109 -1676,-1307 CAN.1@-1371,-1307 -1228,-1450 -1228,-1451 -518,-1451 ; IC1.1@-1765.05,-626 IC1.1@-1765.05,-623.21 ; C28.2@-1765.05,-247 -1765.05,-547.21 IC1.1@-1765,-547.26 ; CAN.1@-1404.41,-1340.41 ccw(c-1485.06,-1421.06) -1485.06,-1307 ccw(c-1485.06,-1192.94) CAN.1@-1404.41,-1273.59 ; CAN.1@-1371,-1354.24 cw(c-1371,-1468.3) -1290.35,-1387.65 cw(c-1209.7,-1307) CAN.1@-1323.75,-1307 ; C23.2@-550.12,-879.39 -481.5,-948 ; -482,-948 -482,-1415 -518,-1451 ; v1(-230,-645) -230,-883 -151,-962 -151,-1171 -82,-1240 -82,-1334.14 -198.86,-1451 -518,-1451 ; U24.1@-172.35,316.69 cw(c-202.59,286.45) -159.82,286.45 cw(c-117.05,286.45) U24.1@-147.29,316.69 ; U24.1@-159.82,354.81 -159.82,259.84 42.18,259.84 ; U10.14@-112.65,-506.47 -29.46,-506.47 v1(47,-430) Ud1.4@47,-316.23 42,-311.23 v1(42,-179) ; U25.1@29.65,315.69 cw(c-0.59,285.45) 42.18,285.45 cw(c84.95,285.45) U25.1@54.71,315.69 ; U25.1@29.65,391.93 ccw(c-0.15,421.74) 42,421.74 ; Ud1.4@34.47,-354.35 cw(c4.23,-384.59) 47,-384.59 cw(c89.77,-384.59) Ud1.4@59.53,-354.35 ; Ud1.4@34.47,-278.11 ccw(c16.3,-259.94) 42,-259.94 ; 42,-235.79 ccw(c101.85,-235.79) Ud1.4@59.53,-278.11 ; 42,422.61 ccw(c85.39,422.61) U25.1@54.71,391.93 ; v1(42,450) 42,353.99 U25.1@42.18,353.81 42.18,259.84 ; Ud2.4@241.47,-353.35 cw(c211.23,-383.59) 254,-383.59 cw(c296.77,-383.59) Ud2.4@266.53,-353.35 ; v1(254,-431) Ud2.4@254,-315.23 ; Ud3.4@447.47,-352.35 cw(c417.23,-382.59) 460,-382.59 cw(c502.77,-382.59) Ud3.4@472.53,-352.35 ; v1(460,-431) Ud3.4@460,-314.23 ; U28.1@636.65,315.69 cw(c606.41,285.45) 649.18,285.45 cw(c691.95,285.45) U28.1@661.71,315.69 ; U28.1@649.18,353.81 649.18,259.84 ; Ud4.4@654.47,-352.35 cw(c624.23,-382.59) 667,-382.59 cw(c709.77,-382.59) Ud4.4@679.53,-352.35 ; v1(667,-431) Ud4.4@667,-314.23 ; U29.1@837.65,315.69 cw(c807.41,285.45) 850.18,285.45 cw(c892.95,285.45) U29.1@862.71,315.69 ; U29.1@850.18,353.81 850.18,259.84 ; U36.4@940.23,316.21 cw(c909.98,285.97) 952.76,285.97 cw(c995.53,285.97) U36.4@965.28,316.21 ; U36.4@952.76,354.33 952.76,259.84 ; v1(1134,-440) 1134.36,-439.65 U11.14@1134.36,-513.47 ; U35.4@1141.02,316.21 cw(c1110.77,285.97) 1153.54,285.97 cw(c1196.31,285.97) U35.4@1166.07,316.21 ; U35.4@1153.54,354.33 1153.54,259.84 ; U33.4@1341.8,316.21 cw(c1311.56,285.97) 1354.33,285.97 cw(c1397.1,285.97) U33.4@1366.86,316.21 ; U33.4@1354.33,354.33 1354.33,259.84 ; U32.4@1540.47,315.65 cw(c1510.23,285.41) 1553,285.41 cw(c1595.77,285.41) U32.4@1565.53,315.65 ; U32.4@1553,353.77 1553,261.84 1551,259.84 ; U31.4@1738.47,315.65 cw(c1708.23,285.41) 1751,285.41 cw(c1793.77,285.41) U31.4@1763.53,315.65 ; U31.4@1751,353.77 1751,260.84 1752,259.84 ; U30.4@1939.47,315.65 cw(c1909.23,285.41) 1952,285.41 cw(c1994.77,285.41) U30.4@1964.53,315.65 ; U30.4@1952,353.77 1952,260.84 1951,259.84 1752,259.84 ; 42.18,259.84 244.18,259.84 447.18,259.84 649.18,259.84 ; 649.18,259.84 850.18,259.84 ; 850.18,259.84 952.76,259.84 ; 952.76,259.84 1153.54,259.84 ; 1153.54,259.84 1354.33,259.84 ; 1354.33,259.84 1551,259.84 ; 1551,259.84 1752,259.84
  Top Layer w31.5: IC1.1@-1765.05,-623.21 IC1.1@-1762.26,-626
  Bottom Layer w23.62: IC1.1@-1767.74,-626 IC1.1@-1689,-626 IC1.1@-1689,-547.26 IC1.1@-1767.74,-547.26 ; v1(-230,-645) -230,-562 -96.5,-428.5 -23.95,-428.5 -21.95,-430.5 v1@254,-430.5 ; v1(42,-179) v1(42,450) ; v1(254,-431) v1@254,-430.5 ; v1(460,-431) v1@460,-430.5 ; v1(667,-431) v1@667,-430.5 ; 1111.07,-430.5 cw(c1111.07,-462.93) v1(1134,-440) ; v1@1126,-432 1124.5,-430.5 v1@667,-430.5 ; v1@254,-430.5 v1@460,-430.5 ; v1@460,-430.5 v1@667,-430.5
ADC1: IC2.33
ADC2: IC2.34
ADC3: IC2.35
ADC4: IC2.36
ADC5: IC2.48
ADC6: IC2.47
ADC7: IC2.50
ADC8: IC2.49
BEEP: IC2.31 R2.1 R14.2 | length 1877.1
  Top Layer w7.87: R14.2@-1973,472.05 R2.1@-1899,472 R2.1@-1899,472 -1868.5,441.5 -1782.98,441.5 -1722.49,502 -1669.81,502 -1609.32,441.5 -1411.5,441.5 -1389.28,463.72 -1389.28,501.72 -1381,510 -799.05,510 -759.35,470.3 -759.35,381.21 -654.29,276.15 IC2.31@-570.38,276.15 ; R14.2@-1963.53,462.59 cw(c-1940.68,439.74) -1940.68,472.05 cw(c-1940.68,504.37) R14.2@-1963.53,481.52 ; -1931.45,472.05 cw(c-1931.45,439.55) R2.1@-1908.47,462.54 ; -1931.19,472.05 ccw(c-1931.19,504.19) R2.1@-1908.47,481.47 ; R2.1@-1899,458.62 cw(c-1899,426.3) -1876.15,449.15 cw(c-1853.3,472) R2.1@-1885.62,472 ; IC2.31@-581.51,265.01 ccw(c-608.4,238.13) -608.4,276.15 ccw(c-608.4,314.17) IC2.31@-581.51,287.28
BOOT: IC2.3
CAN_HO: C27.1 CAN.3 D2.K R15.1 U6.7 | length 2169.5
  Top Layer w11.81: U6.7@-1208,-1009.01 cw(c-1208,-1052.51) -1177.25,-1021.75 ; U6.7@-1208,-991 -1073.1,-1125.9 -1005.03,-1125.9 -973.92,-1157 R15.1@-969,-1157 -969,-1306.57 CAN.3@-969.42,-1307 ; CAN.3@-1007.01,-1269.42 ccw(c-1098.77,-1177.66) -969,-1177.66 ; CAN.3@-998.66,-1277.77 ccw(c-1070.25,-1206.17) -969,-1206.17 ; -996.89,-1134.03 ccw(c-969,-1106.13) R15.1@-969,-1145.58 ; CAN.3@-990.3,-1286.12 ccw(c-1041.74,-1234.69) -969,-1234.69 ; R15.1@-985.01,-1145.91 cw(c-996.1,-1157) R15.1@-980.42,-1157 ; R15.1@-977.07,-1165.07 cw(c-996.56,-1184.56) -969,-1184.56 cw(c-941.44,-1184.56) R15.1@-960.93,-1165.07 ; -969,-1236.74 ccw(c-899.17,-1236.74) CAN.3@-948.55,-1286.12 ; -969,-1208.23 ccw(c-870.65,-1208.23) CAN.3@-940.19,-1277.77 ; -969,-1179.71 ccw(c-842.14,-1179.71) CAN.3@-931.84,-1269.42
  Top Layer w15.75: C27.1@-1722.68,-1119.32 ccw(c-1738.81,-1103.19) -1716,-1103.19 ccw(c-1693.19,-1103.19) C27.1@-1709.32,-1119.32 ; C27.1@-1716,-1126 -1716,-1027 D2.K@-1684,-995 -1660,-995 -1589.37,-924.37 -1228.63,-924.37 -1208,-945 U6.7@-1208,-991 ; -1716,-1105.53 cw(c-1587.25,-1105.53) D2.K@-1678.29,-1014.49 ; -1716,-1067.51 cw(c-1625.27,-1067.51) D2.K@-1689.43,-1003.35 ; D2.K@-1716,-1029.49 cw(c-1663.29,-1029.49) D2.K@-1700.56,-992.22 ; D2.K@-1670.22,-983.19 ccw(c-1670.22,-930) -1632.61,-967.61 ; D2.K@-1670.22,-967.44 ccw(c-1670.22,-876.23) -1605.73,-940.73 ; D2.K@-1642.66,-995 cw(c-1600.8,-995) -1630.4,-965.4 ; -1219.62,-933.38 cw(c-1238.17,-951.93) U6.7@-1211.94,-951.93
CAN_LO: C29.2 CAN.2 D1.K J9.2 U6.6 | length 1665.8
  Top Layer w15.75: D1.K@-1512.71,-1016.49 cw(c-1601.46,-1105.24) -1475.94,-1105.24 ; D1.K@-1501.57,-1005.35 cw(c-1563.44,-1067.22) -1475.94,-1067.22 ; D1.K@-1493.2,-1024.56 cw(c-1493.11,-1120.82) -1425.05,-1052.75 ; D1.K@-1493.21,-1008.81 cw(c-1493.16,-1067.16) -1451.9,-1025.9 ; D1.K@-1490.44,-994.22 cw(c-1525.42,-1029.2) D1.K@-1475.94,-1029.2 ; C29.2@-1482.62,-1118.32 ccw(c-1498.75,-1102.19) -1475.94,-1102.19 ccw(c-1453.13,-1102.19) C29.2@-1469.26,-1118.32 ; C29.2@-1475.94,-1125 -1475.94,-1028.06 D1.K@-1507,-997 -1480.8,-997 -1425.05,-1052.76 ; D1.K@-1465.66,-997 ccw(c-1429.11,-997) -1454.95,-1022.85 ; J9.2@-1296.41,-1110.67 ccw(c-1333.38,-1073.71) -1281.1,-1073.71 ccw(c-1228.83,-1073.71) J9.2@-1265.79,-1110.67 ; J9.2@-1281.1,-1125.98 -1281.1,-1052.76 ; U6.6@-1258,-971.52 -1258,-1029.65 -1281.1,-1052.76 ; -1425.05,-1052.76 -1281.1,-1052.76
  Bottom Layer w15.75: J9.2@-1296.41,-1141.3 cw(c-1333.38,-1178.26) -1281.1,-1178.26 cw(c-1228.83,-1178.26) J9.2@-1265.79,-1141.3 ; J9.2@-1281.1,-1125.98 -1281.1,-1196.11 CAN.2@-1170.21,-1307 ; CAN.2@-1221.39,-1307 ccw(c-1344.96,-1307) -1257.58,-1219.63 ccw(c-1170.21,-1132.26) CAN.2@-1170.21,-1255.82 ; CAN.2@-1205.65,-1307 ccw(c-1291.19,-1307) -1230.7,-1246.51 ccw(c-1170.21,-1186.02) CAN.2@-1170.21,-1271.57
CAN_RX: IC2.68 U6.4 | length 353.1
  Top Layer w7.87: U6.4@-1308,-786.48 -1308,-766 -1255,-713 -1205.2,-713 IC2.68@-1121.56,-629.36 ; U6.4@-1308,-759.01 ccw(c-1308,-742.15) -1296.07,-754.07 ; U6.4@-1300.13,-766.89 cw(c-1278.97,-766.89) -1293.93,-751.93 ; IC2.68@-1137.31,-629.36 cw(c-1175.33,-629.36) -1148.44,-656.24 cw(c-1121.56,-683.13) IC2.68@-1121.56,-645.11
CAN_TX: IC2.67 U6.1 | length 366.6
  Top Layer w7.87: U6.1@-1163.57,-761.32 ccw(c-1177.01,-747.88) -1158,-747.88 ccw(c-1138.99,-747.88) U6.1@-1152.43,-761.32 ; U6.1@-1158,-786.48 -1158,-726.09 -1090.06,-658.16 -1090.06,-582.12 IC2.67@-1121.56,-550.62 ; IC2.67@-1121.56,-566.37 cw(c-1121.56,-604.39) -1094.68,-577.5 cw(c-1067.79,-550.62) IC2.67@-1105.81,-550.62
DAC1: IC2.39
DAC2: IC2.40
DIR1: DIR.11 DIR.12 JP1.3 | length 2217.2
  Top Layer w19.68: v1(1592,-822) 1648,-766 DIR.11@1648,-734.92 DIR.12@1698,-734.92
  Bottom Layer w19.68: JP1.3@34.58,-1307 438.05,-903.53 805.47,-903.53 856,-853 1561,-853 v1(1592,-822) ; JP1.3@34.58,-1277.47 ccw(c34.58,-1206.19) 84.98,-1256.59 ccw(c135.39,-1307) JP1.3@64.1,-1307 ; JP1.3@34.58,-1257.79 ccw(c34.58,-1138.98) 118.59,-1222.99 ccw(c202.6,-1307) JP1.3@83.79,-1307
DIR2: DIR.13 DIR.14 JP2.3 | length 1901.2
  Top Layer w19.68: JP2.3@636.57,-1356.21 cw(c636.57,-1475.02) 720.59,-1391.01 cw(c804.6,-1307) JP2.3@685.79,-1307 ; JP2.3@636.57,-1336.53 cw(c636.57,-1407.81) 686.98,-1357.41 cw(c737.39,-1307) JP2.3@666.1,-1307 ; JP2.3@636.57,-1307 734.58,-1405 1090,-1405 1151,-1344 1151,-1280 1335,-1096 1335,-978 1385,-928 1583,-928 1748,-763 DIR.13@1748,-734.92 DIR.14@1798,-734.92